# Altium PCB blinkers.PcbDoc
Units mil, origin at the board's own origin, x right, y up, seen from the top; angles counter-clockwise.
Board outline 885.83 x 393.7 mil, 2 copper layers (Top Layer, Bottom Layer); 7 components, 6 nets, 15 pads, 0 vias.
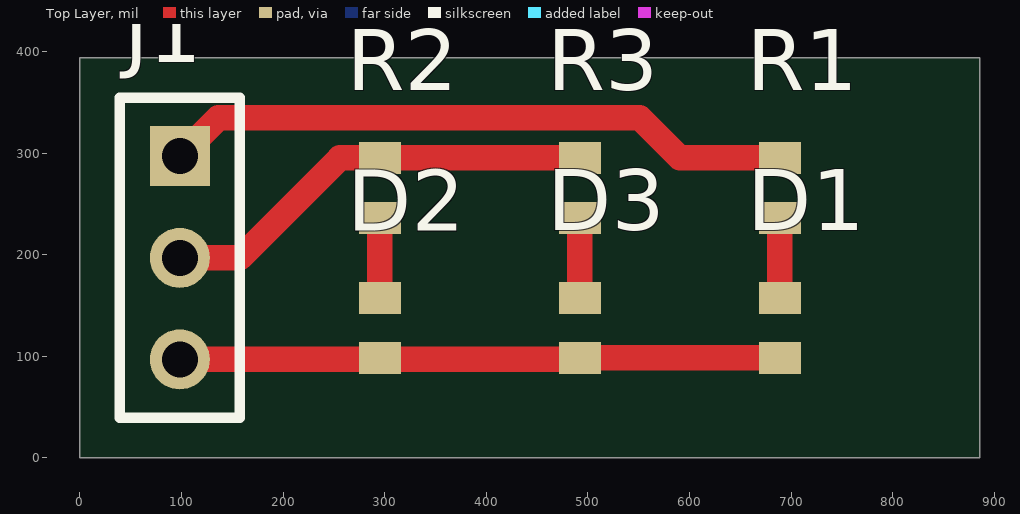
[diagram p0: Top Layer view]
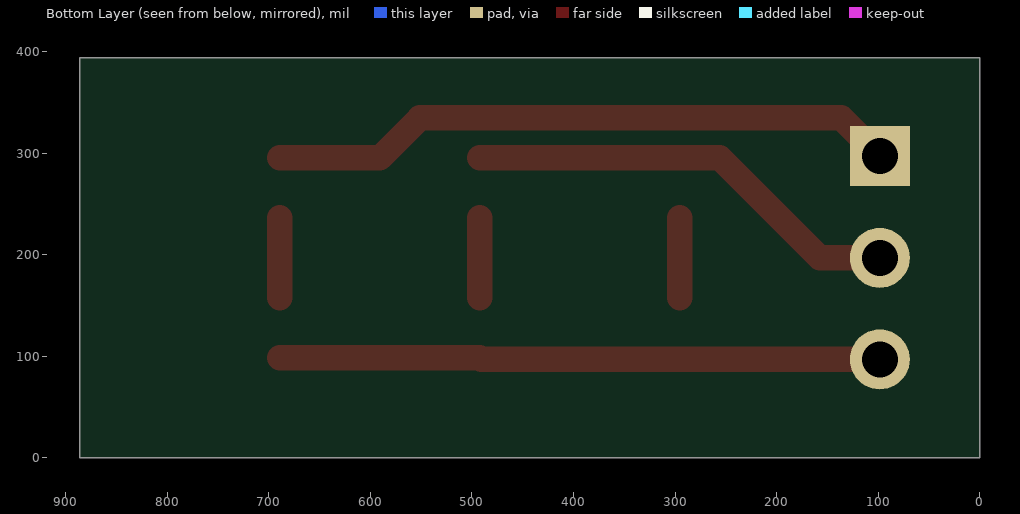
[diagram p1: Bottom Layer view, seen from below]

## Layer stack, top to bottom
Top Solder: solder mask 0.4, Solder Resist, Dk 3.5
Top Layer: signal copper 1.4
Dielectric1: dielectric 12.6, FR-4, Dk 4.8
Bottom Layer: signal copper 1.4
Bottom Solder: solder mask 0.4, Solder Resist, Dk 3.5

## Board outline
0,0 0,393.7 885.83,393.7 885.83,0

## Design rules (kind name [scope] priority, off if disabled: settings)
Clearance [All] p1: gap=10
FabricationTestPointUsage TestPointUsage [All] p1: valid=0 allowmultiple=FALSE
FabricationTestpoint Testpoint [All] p1: side=3 testpointundercomponent=TRUE minsize=40 maxsize=100 preferedsize=60 minholesize=0 maxholesize=40 preferedholesize=32 testpointgrid=1 allowsidetop=TRUE allowsidebottom=TRUE usegrid=TRUE gridtolerance=0.01
PolygonConnect [All] p1: connectstyle=Relief reliefconductorwidth=10 reliefentries=4 polygonreliefangle="90 Angle" airgapwidth=10
RoutingVias [All] p1: holewidth=28 width=50 viastyle="Through Hole" minholewidth=28 minwidth=50 maxholewidth=28 maxwidth=50
SilkToSolderMaskClearance SilkscreenOverComponentPads [IsPad] p1: minsilkscreentomaskgap=10 clearancetoexposedcopper=TRUE
SolderMaskExpansion [All] p1: expansion=4
Width [All] p1: maxlimit=10 minlimit=10 preferedwidth=10
27 further rules are at their usual default settings.

## Components (designator, comment, footprint, x,y, rotation, side; value= is the part's Value field where it differs from the comment)
D1 "ORANGE" RESC1608X06M 688.98,127.95 r270 top
D2 "WHITE" RESC1608X06M 295.28,127.95 r270 top
D3 "WHITE" RESC1608X06M 492.13,127.95 r270 top
J1 "CNCTR" CNCTR_1X3 98.43,196.85 r0 top
R1 "RES" RESC1608X06M 688.98,265.75 r270 top
R2 "RES" RESC1608X06M 295.28,265.75 r90 top
R3 "RES" RESC1608X06M 492.13,265.75 r90 top

## Footprints (in the part's own frame and the unit in brackets; to place one, negate y for a bottom-side part, rotate by r counter-clockwise, add the part's x,y. Pads: shape width x height; smd on the part's side, far side on the other; paste and mask are expansions set on the pad)
CNCTR_1X3 [mm] "3-pin connector"
  rect 1.5x1.5 hole 0.9: 1(0,2.54)
  round 1.5 hole 0.9: 2(0,0) 3(0,-2.54)
  silkscreen extent -1.5,-4 1.5,4
RESC1608X06M [mm] "Chip Resistor, 2-Leads, Body 1,60x0,82mm, IPC Low Density"
  rect 0.8x1.05 smd: 1(-0.75,0) 2(0.75,0)
  body extent -0.85,-0.48 0.85,0.48, height 0.6

## Part data
D1 D2 D3: library part LED
J1: library part Connector, "3pin connector"
R1 R2 R3: "Resistor"

## Nets (pads, with @x,y where several pads share a name; then routed paths per layer and width w, separated by ;. In a path a pad name is that pad's centre, name@x,y a point inside that pad or via, vN(x,y) a via of type N, cw(c..) or ccw(c..) an arc to the next point about the centre after c; other vN are vias at no path point)
GND: D1.2 D2.2 D3.2 J1.3 | length 591.2
  Top Layer w10: D3.2@490.55,96.85 D3.2
  Top Layer w25: J1.3 D3.2@490.55,96.85 ; D3.2 D1.2
NetD1_1: D1.1 R1.2 | length 78.7
  Top Layer w25: D1.1 R1.2
NetD2_1: D2.1 R2.1 | length 78.7
  Top Layer w25: D2.1 R2.1
NetD3_1: D3.1 R3.1 | length 78.7
  Top Layer w25: D3.1 R3.1
NetJ1_1: J1.1 R1.1 | length 622.5
  Top Layer w25: J1.1 136.22,334.65 551.18,334.65 590.55,295.28 R1.1
VCC: J1.2 R2.2 R3.2 | length 434.5
  Top Layer w25: J1.2 157.48,196.85 255.91,295.28 R2.2 R3.2

## Silkscreen, mask and mechanical layers (free items; w line width, h text height)
Mechanical 16:
  drawing of 1874 lines, arcs and shapes, not listed
  text "1" at -1153,5335 h70
  text "2" at 1707,5335 h70
  text "3" at 4587,5335 h70
  text "4" at 7457,5335 h70
  text "A" at -2505,4429 h70
  text "A" at 8795,4429 h70
  text "B" at -2505,2537 h70
  text "B" at 8795,2537 h70
  text "C" at -2505,627 h70
  text "C" at 8795,627 h70
  text "ENGINEER:" at 4270,-830 h45
  text "TITLE:" at 5770,-830 h45
  text "PCB DESIGNER:" at 4270,-1125 h45
  text "D" at -2505,-1263 h70
  text "D" at 8795,-1263 h70
  text "DATE:" at 4270,-1430 h45
  text "PART NO.:" at 5770,-1430 h45
  text "REV:" at 7870,-1430 h45
  text "Altium Limited" at 2970,-1530 h70
  text ".PRINT_DATE" at 4320,-1550 h70
  text "12a Rodborough Rd" at 2970,-1630 h70
  text "Frenchs Forest" at 2970,-1730 h70
  text "FILE NAME:" at 4270,-1730 h45
  text "DWG NO:" at 5770,-1730 h45
  text "SCALE:" at 7870,-1730 h45
  text "NSW 2086" at 2970,-1830 h70
  text ".PCB_FILE_NAME_NO_PATH" at 4320,-1850 h70
  text "1" at -1153,-2065 h70
  text "2" at 1707,-2065 h70
  text "3" at 4587,-2065 h70
  text "4" at 7457,-2065 h70